# Altium PCB CAN-to-CAN.PcbDoc
Units mm, origin at the board's own origin, x right, y up, seen from the top; angles counter-clockwise.
Board outline 50.93 x 100.58 mm, 4 copper layers (Top Layer 1, GND, +5V, Bottom Layer 4), stack 0.603 mm thick; 112 components, 87 nets, 365 pads, 120 vias.
Unrouted connection lines stored in the file: 50.
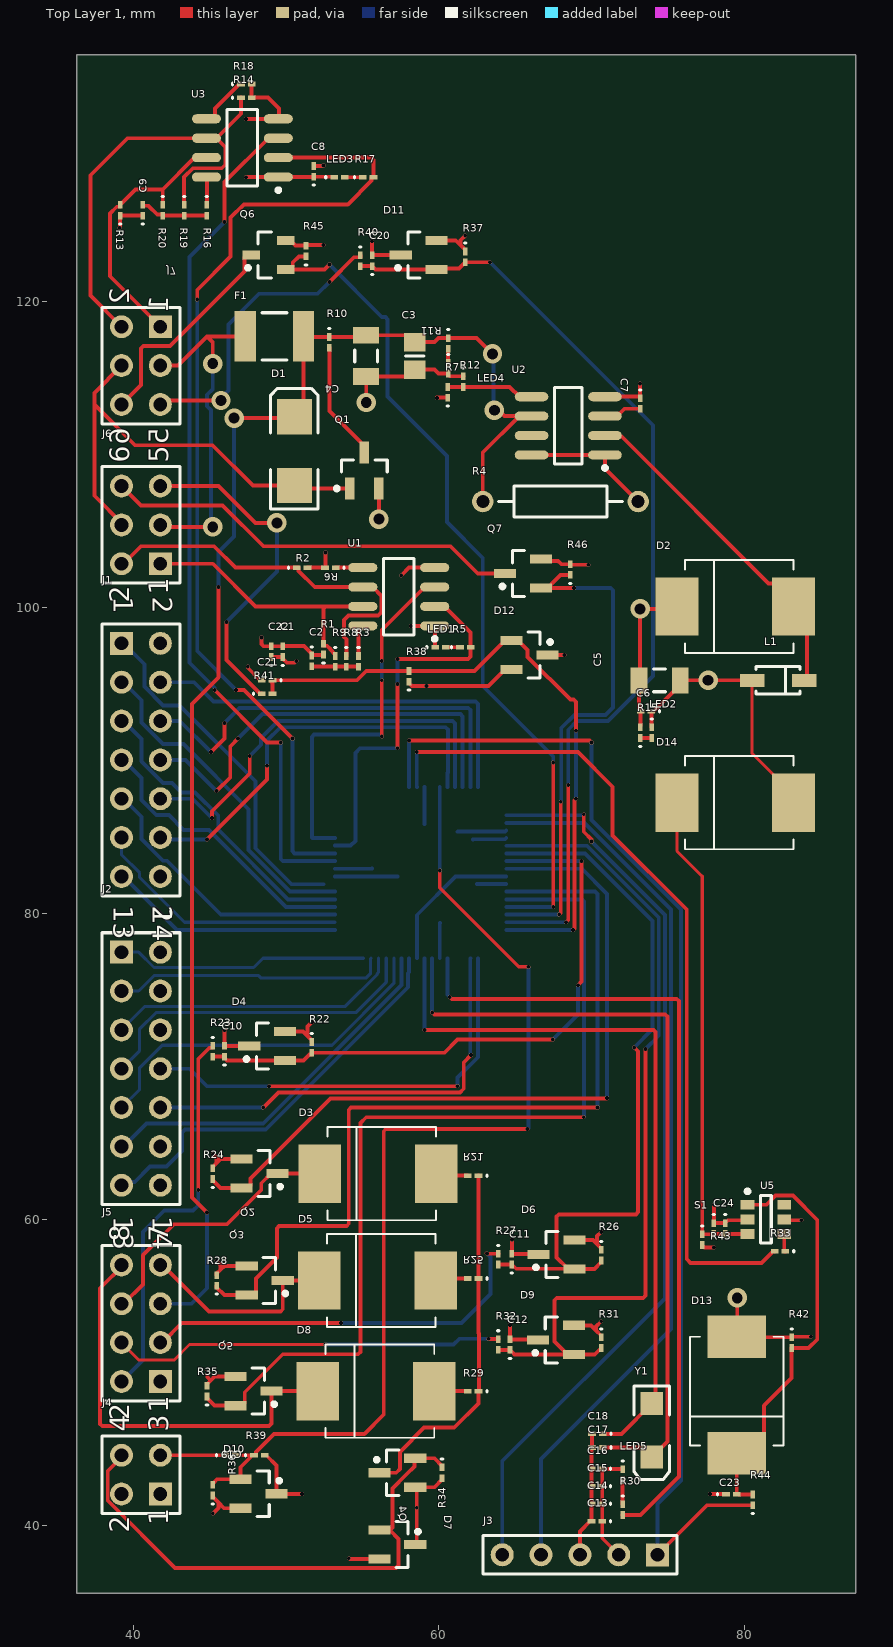
[diagram p0: Top Layer 1 view]
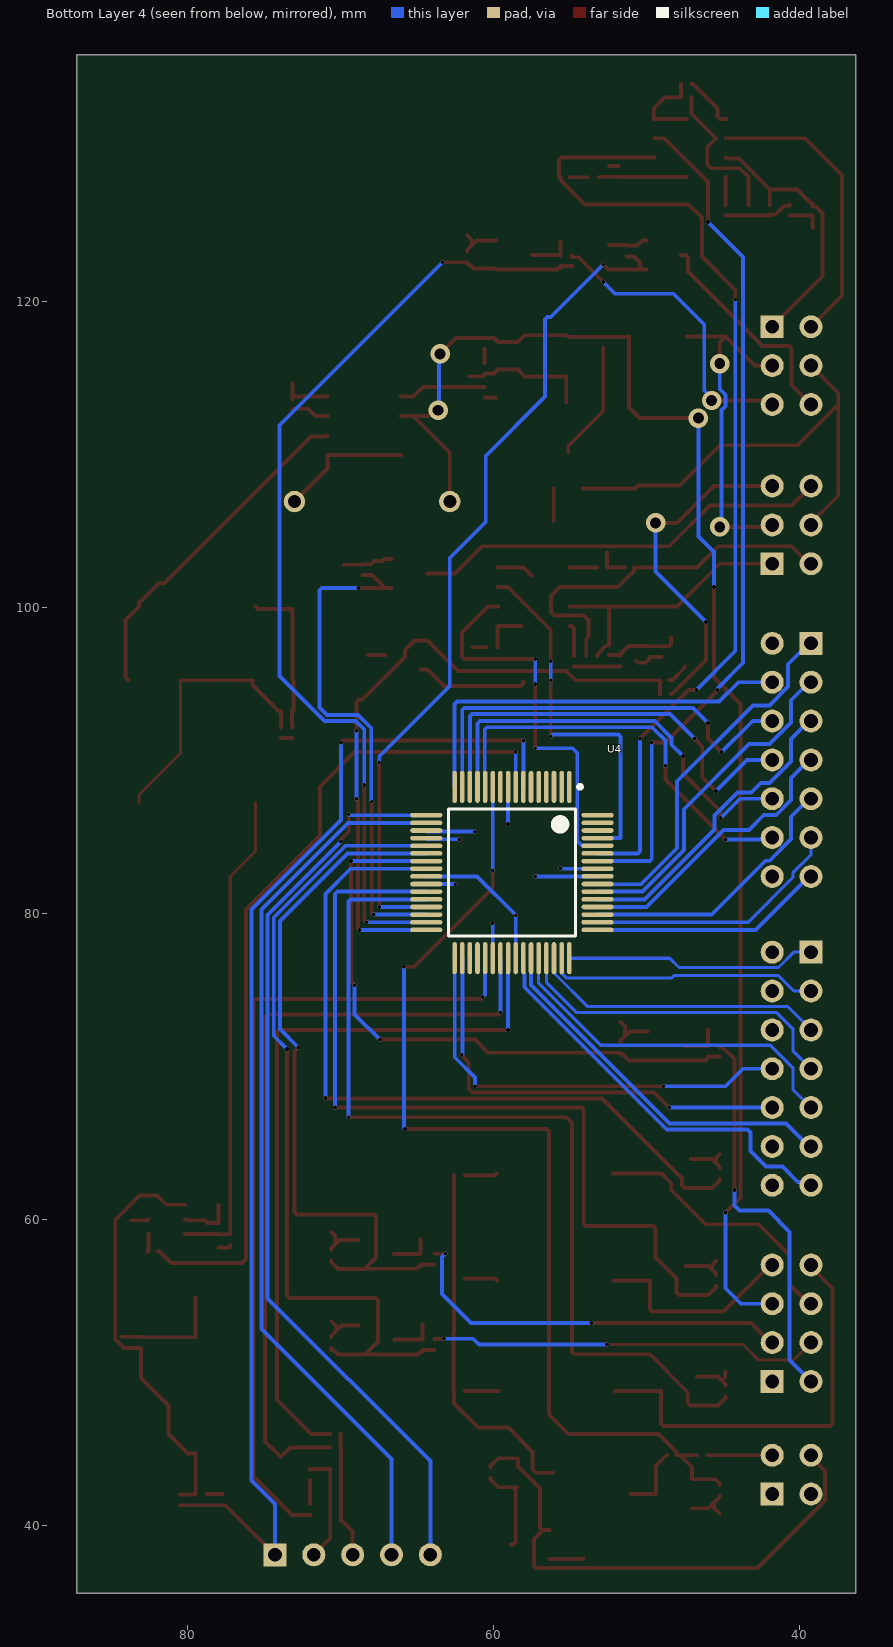
[diagram p1: Bottom Layer 4 view, seen from below]
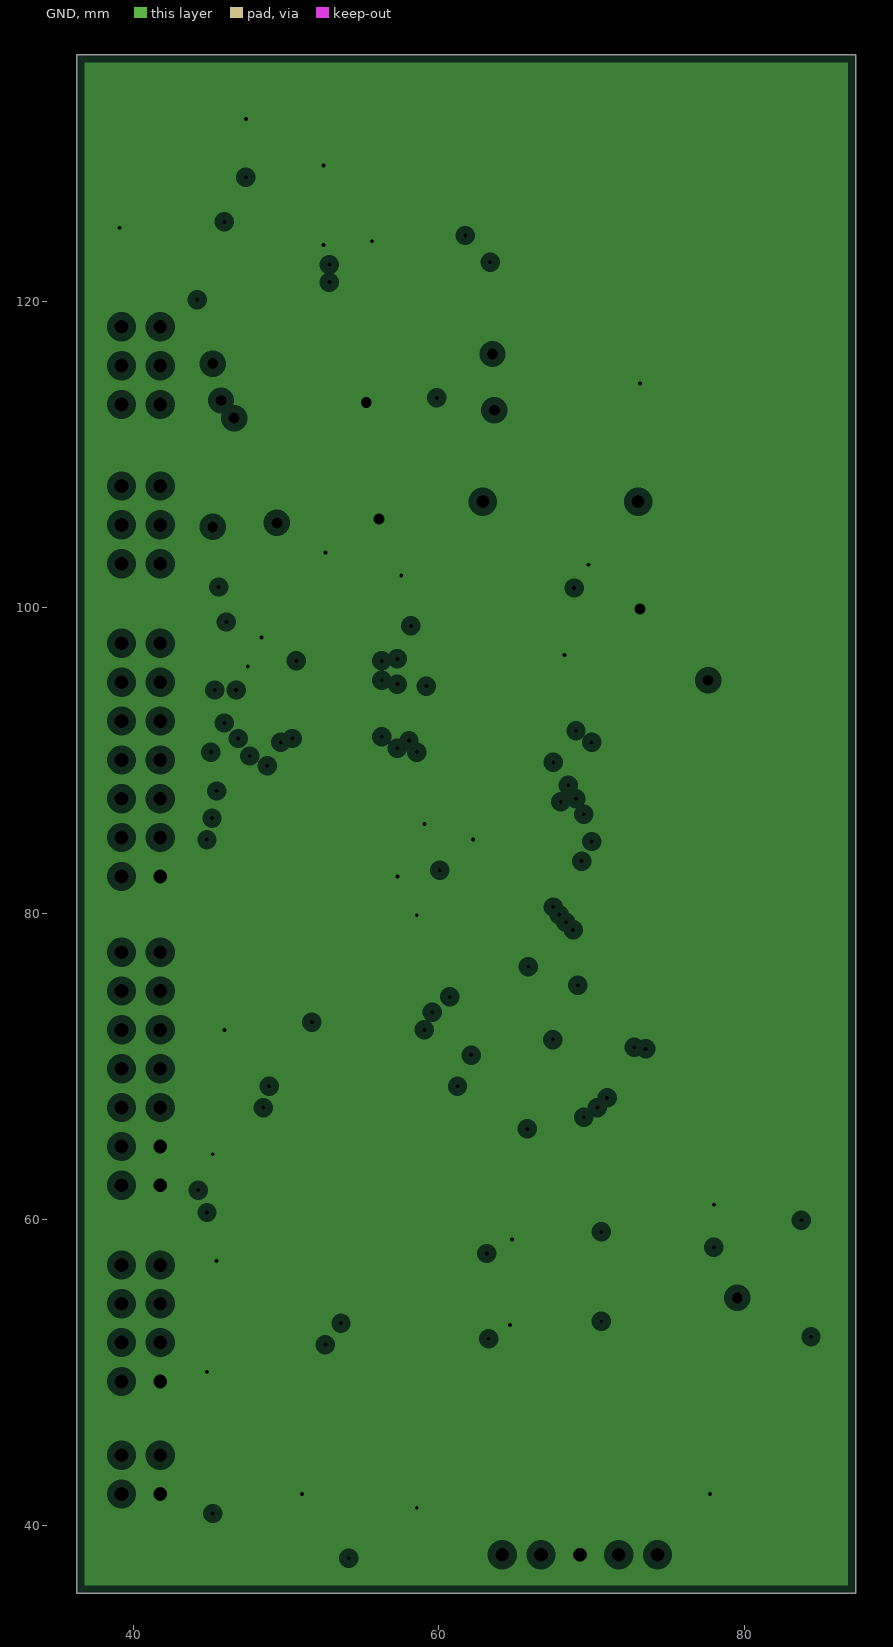
[diagram p2: GND, clearances drawn from the general rule]
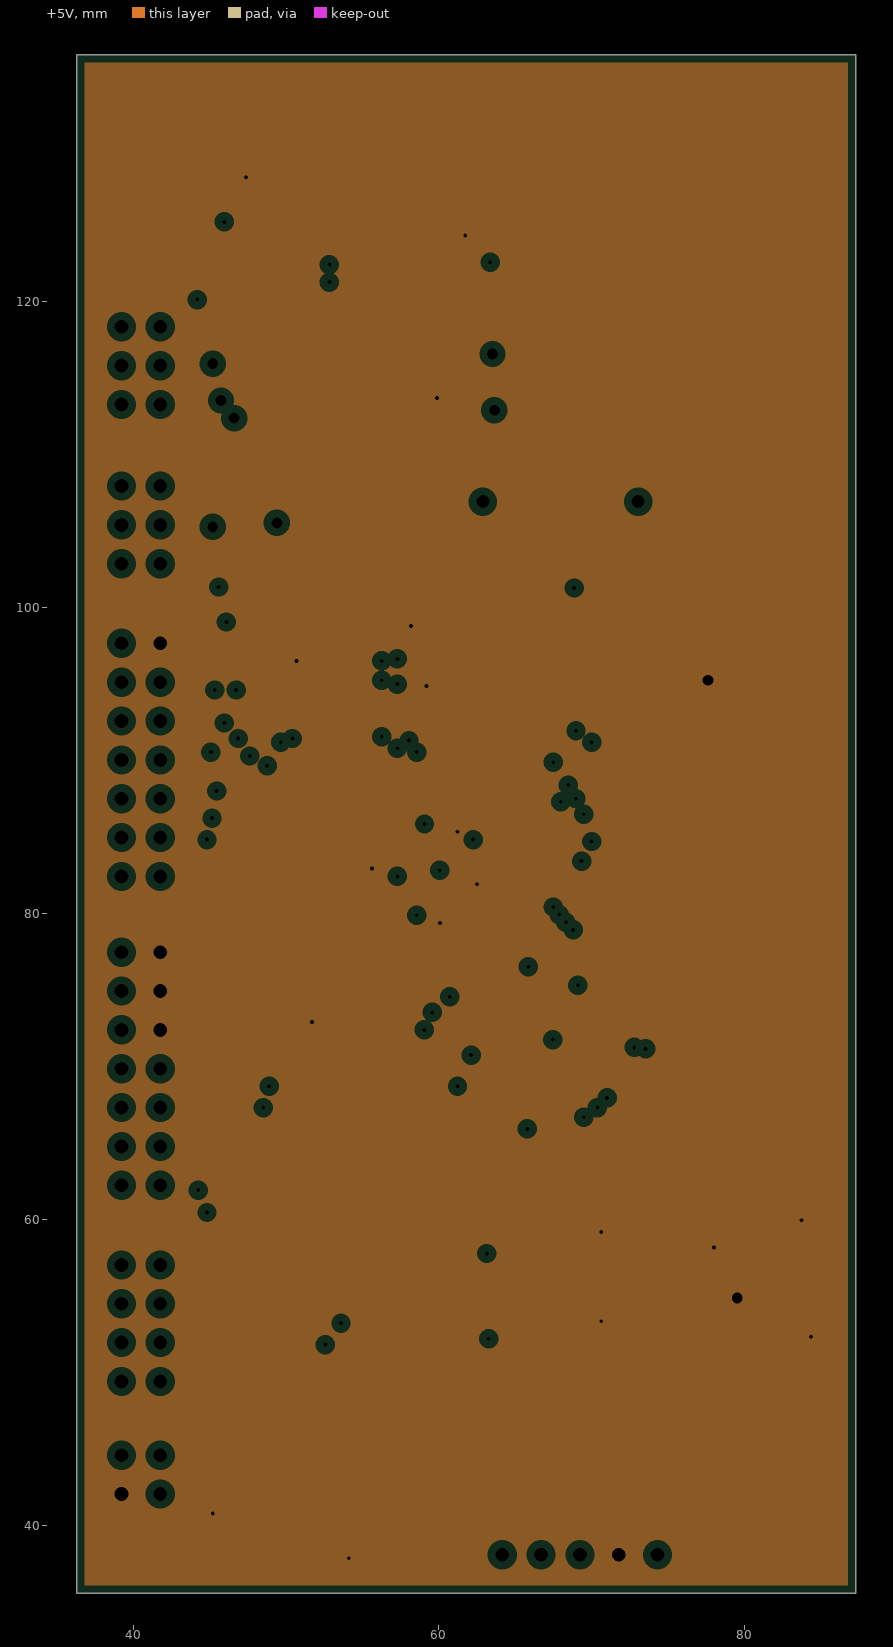
[diagram p3: +5V, clearances drawn from the general rule]

## Layer stack, top to bottom
Top Solder: solder mask 0.0102, Solder Resist, Dk 3.5
Top Layer 1: signal copper 0.0356
Dielectric 2: prepreg 0.0711, PP-006, Dk 4.1
GND: plane copper 0.035, net GND
Dielectric 1: dielectric 0.32, FR-4, Dk 4.8
+5V: plane copper 0.035, net +5V
Dielectric 3: prepreg 0.0711, PP-006, Dk 4.1
Bottom Layer 4: signal copper 0.0356
Bottom Solder: solder mask 0.0102, Solder Resist, Dk 3.5

## Board outline
36.322,136.144 87.249,136.144 87.249,35.56 36.322,35.56

## Design rules (kind name [scope] priority, off if disabled: settings)
Clearance [All] p1: gap=0.152 ignorepadtopadclearanceinfootprint=FALSE except(0: Arc-Hole Track-Hole SMDPad-Hole THPad-Hole Via-Hole Fill-Hole Poly-Hole Region-Hole Text-Hole)
PlaneClearance [All] p1: clearance=0.508
PlaneConnect [All] p1: planeconnectstyle=Relief reliefexpansion=0.508 reliefentries=4 reliefconductorwidth=0.254 reliefairgap=0.254
PolygonConnect [All] p1: connectstyle=Relief reliefconductorwidth=0.254 reliefentries=4 polygonreliefangle="90 Angle" airgapwidth=0.254
RoutingVias [All] p1: holewidth=0.711 width=1.27 viastyle="Through Hole" minholewidth=0.711 minwidth=1.27 maxholewidth=0.711 maxwidth=1.27
ShortCircuit [All] p1: allowed=TRUE
SolderMaskExpansion [All] p1: expansion=0.102 istentingtop=FALSE
Width [All] p1: maxlimit=0.254 minlimit=0.203 preferedwidth=0.254 minimp=50.000000 maximp=50.000000 favimp=50.000000
27 further rules are at their usual default settings.

## Components (designator, comment, footprint, x,y, rotation, side; value= is the part's Value field where it differs from the comment)
C1 "100n" 0603 49.784,97.124 r90 top
C2 "4n7" 0603 51.689,96.52 r270 top value=100n
C3 "100n" 6-0805_N 58.42,116.459 r270 top
C4 "Cap Semi" C1206 55.245,116.459 r270 top value=100pF
C5 "Cap Semi" C1206 74.422,95.25 r180 top value=100pF
C6 "100n" 0603 73.533,93.218 r180 top
C7 "100p" 0603 73.154,113.344 r270 top value=100pF
C8 "100n" 0603 51.816,128.524 r90 top
C9 "4n7" 0603 40.64,125.984 r90 top value=100n
C10 "100n" 0603 45.974,70.993 r90 top
C11 "100n" 0603 64.77,57.404 r90 top
C12 "100n" 0603 64.643,51.816 r90 top
C13 "100n" 0603 70.327,40.259 r180 top
C14 "100n" 0603 70.327,41.402 r180 top
C15 "100n" 0603 70.327,42.545 r180 top
C16 "100n" 0603 70.327,43.688 r180 top
C17 "27p" 0603 70.358,45.085 r180 top value=100n
C18 "27p" 0603 70.358,45.974 r180 top value=100n
C19 "100n" 0603 48.26,44.577 r0 top
C20 "100n" 0603 55.626,122.682 r90 top
C21 "100n" 0603 48.768,95.25 r180 top
C22 "100n" 0603 49.022,97.124 r90 top
C23 "100n" 0603 79.121,42.037 r0 top
C24 "10n" 0603 78.709,59.405 r270 top value=100pF
D1 "P6SMB15A" SMB 50.546,110.236 r90 top
D2 "LL5817" DIODE_SMC 79.375,100.076 r0 top
D3 "LL4148" DIODE_SMC 56.007,62.992 r0 top
D4 "BAT54S" SOT23_M#1 48.767,71.335 r180 top
D5 "LL4148" DIODE_SMC 55.976,56.007 r0 top
D6 "BAT54S" SOT23_M#1 67.69,57.71 r180 top
D7 "BAT54S" SOT23_M#1 57.277,38.735 r0 top
D8 "LL4148" DIODE_SMC 55.88,48.768 r0 top
D9 "BAT54S" SOT23_M#1 67.648,52.122 r180 top
D10 "BAT54S" SOT23_M#1 48.204,42.061 r0 top
D11 "BAT54S" SOT23_M#1 58.673,123.063 r180 top
D12 "BAT54S" SOT23_M#1 65.913,96.901 r0 top
D13 "LL4148" DIODE_SMC 79.471,48.514 r90 top
D14 "LL4448" DIODE_SMC 79.375,87.249 r0 top
F1 "Fuse 1" 1812 49.245,117.729 r0 top
J1 "Header 7X2" HDR2X7 39.243,97.663 r270 top
J2 "Header 7X2" HDR2X7 39.243,77.47 r270 top
J3 "ZL201" HDR1X5 74.295,38.069 r180 top
J4 "MX-43045-0400" HDR2X2 41.783,42.037 r90 top
J5 "MX-43045-0800" HDR2X4 41.783,49.403 r90 top
J6 "MX-43045-0600" HDR2X3#1 41.783,102.87 r90 top
J7 "MX-43045-0600" HDR2X3#2 41.783,118.364 r270 top
L1 "Inductor Isolated" 425 82.169,95.25 r180 top value=10mH
LED1 "HCL-1904AYL" 0603 60.102,97.409 r0 top
LED2 "HCL-1903BG4" 0603 73.914,91.821 r270 top
LED3 "HCL-1906BR1" 0603 53.498,128.143 r0 top
LED4 "HCL-1904AYL" 0603 60.6,115.655 r270 top
LED5 "HCL-1906BR1" 0603 72.009,43.307 r270 top
Q1 "BSS138" SOT-23_M 55.118,108.966 r90 top
Q2 "BSS123" SOT23_M#2 48.26,62.992 r0 top
Q3 "BSS123" SOT23_M#2 48.61,56.007 r0 top
Q4 "BSS123" SOT23_M#2 57.277,43.434 r180 top
Q5 "BSS123" SOT23_M#2 47.879,48.768 r0 top
Q6 "BSS123" SOT23_N 48.864,123.063 r180 top
Q7 "BSS123" SOT23_M#1 65.501,102.235 r180 top
R1 "CAN0001" 0603 52.451,97.282 r90 top
R2 "CAN0001" 0603 51.054,102.616 r0 top
R3 "nc" 0603 54.737,96.489 r270 top value=1K
R4 "1R" AXIAL-0.4 67.945,106.934 r180 top value=1K
R5 "4k7" 0603 61.722,97.409 r0 top value=1K
R6 "1k" 0603 52.897,102.616 r180 top value=1K
R7 "3k6 1%" 0603 60.579,114.077 r90 top value=1K
R8 "68" 0603 53.944,96.489 r270 top value=1K
R9 "68" 0603 53.213,96.489 r270 top value=1K
R10 "1M" 0603 52.832,117.348 r270 top value=1K
R11 "1k2 1%" 0603 61.595,114.777 r270 top value=1K
R12 "4k7" 0603 60.6,117.275 r270 top value=1K
R13 "CAN0001" 0603 39.147,125.984 r90 top
R14 "CAN0001" 0603 47.402,133.35 r0 top
R15 "1k8" 0603 73.152,91.821 r90 top value=1K
R16 "nc" 0603 44.825,125.984 r270 top value=1K
R17 "4k7" 0603 55.372,128.143 r0 top value=1K
R18 "1k" 0603 47.402,134.239 r0 top value=1K
R19 "68" 0603 43.338,125.984 r270 top value=1K
R20 "68" 0603 41.941,125.984 r270 top value=1K
R21 "10k" 0603 62.23,62.865 r180 top value=1K
R22 "10k" 0603 51.689,71.247 r270 top value=1K
R23 "1k" 0603 45.212,70.993 r270 top value=1K
R24 "4k7" 0603 45.212,62.992 r90 top value=1K
R25 "10k" 0603 62.23,56.134 r180 top value=1K
R26 "10k" 0603 70.612,57.658 r270 top value=1K
R27 "1k" 0603 63.881,57.404 r270 top value=1K
R28 "4k7" 0603 45.466,56.007 r90 top value=1K
R29 "10k" 0603 62.23,48.768 r180 top value=1K
R30 "1k8" 0603 72.009,41.021 r270 top value=1K
R31 "10k" 0603 70.612,51.943 r270 top value=1K
R32 "1k" 0603 63.881,51.816 r270 top value=1K
R33 "nc" 0603 82.296,57.912 r180 top value=1K
R34 "4k7" 0603 60.198,43.434 r270 top value=1K
R35 "4k7" 0603 44.831,48.768 r90 top value=1K
R36 "10k" 0603 45.212,42.291 r90 top value=1K
R37 "10k" 0603 61.722,122.936 r270 top value=1K
R38 "10k" 0603 58.039,95.504 r90 top value=1K
R39 "470" 0603 46.355,44.577 r0 top value=1K
R40 "1k" 0603 54.864,122.682 r270 top value=1K
R41 "1k" 0603 48.768,94.361 r0 top value=1K
R42 "4k7" 0603 83.058,51.943 r270 top value=1K
R43 "10k" 0603 77.216,58.674 r270 top value=1K
R44 "4k7" 0603 80.518,41.656 r90 top value=1K
R45 "4k7" 0603 51.308,123.317 r90 top value=1K
R46 "4k7" 0603 68.58,102.489 r90 top value=1K
S1 "DTSM32NB" 0603 77.978,59.405 r270 top
U1 "MCP2551-I/SN" SO8_L 57.373,100.711 r180 top
U2 "MC33063AD" SO8_N 68.453,111.887 r180 top
U3 "MCP2551-I/SN" SO8_L 47.148,130.057 r180 top
U4 "PIC30F5011" ST-64-2_M 58.801,82.677 r270 bottom
U5 "MCP1320-46LT" SOT23-6_L 81.376,60.005 r0 top
Y1 "10MHz" 3.2X1.6X1.1 73.914,46.2 r270 top

## Footprints (in the part's own frame and the unit in brackets; to place one, negate y for a bottom-side part, rotate by r counter-clockwise, add the part's x,y. Pads: shape width x height; smd on the part's side, far side on the other; paste and mask are expansions set on the pad)
3.2X1.6X1.1 [mm] "SMT LED; 2 Flat Leads"
  rect 1.5x1.5 smd: 1(-1.75,0) 2(1.75,0)
  silkscreen extent -2.9,-1.15 3.2,1.15
6-0805_N [mm] "Chip Resistor, Body 2.0x1.2mm, IPC Medium Density"
  rect 1.2x1.4 smd: 1(-0.9,0) 2(0.9,0)
  silkscreen extent 0,-0.6 0,0.6, body extent -1.07,-0.7 1.07,0.7, height 0.7
425 [mm] "SOD-123; 2 Leads; Body 2.7 x 1.6 mm, (LxW)"
  rect 1.6x0.85 smd: 1(-1.7,0) 2(1.7,0)
  silkscreen extent -1.45,-0.9 1.45,0.9
0603 [mm] "Chip Inductor, Body 0.6x0.3mm, IPC High Density"
  rect 0.5x0.3 smd: 1(-0.35,0) 2(0.35,0)
  silkscreen extent -0.9,-0.05 -0.9,0.05, body extent -0.33,-0.18 0.33,0.18, height 0.55
1812 [mm] "Chip Capacitor, Body 4.5x3.2mm, IPC High Density"
  rect 1.4x3.3 smd: 1(-1.9,0) 2(1.9,0)
  silkscreen extent -0.8,-1.55 0.8,1.55, body extent -2.4,-1.7 2.4,1.7, height 1.4
AXIAL-0.4 [mm] "Axial Device, Thru-Hole; 2 Leads; 0.4 in Pin Spacing"
  round 1.4 hole 0.85: 1(-5.08,0) 2(5.08,0)
  silkscreen extent -4.06,-1.02 4.06,1.02
C1206 [mm] "Chip Capacitor, Body 3.2x1.6mm, IPC High Density"
  rect 1.1x1.7 smd: 1(-1.35,0) 2(1.35,0)
  silkscreen extent -0.4,-0.75 0.4,0.75, body extent -1.7,-0.9 1.7,0.9, height 1.3
DIODE_SMC [mil] "Diode; 2 Leads"
  rect 110x150 smd: 1(-150,0) 2(150,0)
  silkscreen extent -130,-120 150,120
HDR1X5 [mm] "Connector; Header; 5 Position"
  rect 1.5x1.5 hole 0.9: 1(0,0)
  round 1.5 hole 0.9: 2(2.54,0) 3(5.08,0) 4(7.62,0) 5(10.16,0)
  silkscreen extent -1.27,-1.27 11.43,1.27
HDR2X2 [mm] "Connector; Header; 2x2 Position"
  rect 1.5x1.5 hole 0.9: 1(0,0)
  round 1.5 hole 0.9: 2(0,2.54) 3(2.54,0) 4(2.54,2.54)
  silkscreen extent -1.27,-1.27 3.81,3.81
HDR2X3#1 [mm] "Connector; Header; 3x2 Position"
  rect 1.5x1.5 hole 0.9: 1(0,0)
  round 1.5 hole 0.9: 2(0,2.54) 3(2.54,0) 4(2.54,2.54) 5(5.08,0) 6(5.08,2.54)
  silkscreen extent -1.27,-1.27 6.35,3.81
HDR2X3#2 [mm] "Connector; Header; 3x2 Position"
  rect 1.5x1.5 hole 0.9: 1(0,0)
  round 1.5 hole 0.9: 2(0,-2.54) 3(2.54,0) 4(2.54,-2.54) 5(5.08,0) 6(5.08,-2.54)
  silkscreen extent -1.27,-3.81 6.35,1.27
HDR2X4 [mm] "Connector; Header; 4x2 Position"
  rect 1.5x1.5 hole 0.9: 1(0,0)
  round 1.5 hole 0.9: 2(0,2.54) 3(2.54,0) 4(2.54,2.54) 5(5.08,0) 6(5.08,2.54) 7(7.62,0) 8(7.62,2.54)
  silkscreen extent -1.27,-1.27 8.89,3.81
HDR2X7 [mm] "Connector; Header; 7x2 Position"
  rect 1.5x1.5 hole 0.9: 1(0,0)
  round 1.5 hole 0.9: 2(0,2.54) 3(2.54,0) 4(2.54,2.54) 5(5.08,0) 6(5.08,2.54) 7(7.62,0) 8(7.62,2.54) 9(10.16,0) 10(10.16,2.54) 11(12.7,0) 12(12.7,2.54) 13(15.24,0) 14(15.24,2.54)
  silkscreen extent -1.27,-1.27 16.51,3.81
SMB [mm] "DO-214-AA/SMB; 2 C-Bend Leads; Body 5.3 x 3.6 mm, inc. leads (LxW)"
  rect 2.3x2.3 smd: 1(-2.25,0) 2(2.25,0)
  silkscreen extent -3.8,-1.55 4.1,1.55
SO8_L [mm] "SOIC, 8-Leads, Body 4.9x3.9mm, Pitch 1.27mm, IPC High Density"
  oval 1.9x0.6 smd: 1(-2.35,1.905) 2(-2.35,0.635) 3(-2.35,-0.635) 4(-2.35,-1.905) 5(2.35,-1.905) 6(2.35,-0.635) 7(2.35,0.635) 8(2.35,1.905)
  silkscreen extent -2.48,-2.5 1,2.88, body extent -2,-2.5 2,2.5, height 1.75
SO8_N [mm] "SOIC, 8-Leads, Body 4.9x3.9mm, Pitch 1.27mm, IPC Medium Density"
  oval 2.2x0.6 smd: 1(-2.4,1.905) 2(-2.4,0.635) 3(-2.4,-0.635) 4(-2.4,-1.905) 5(2.4,-1.905) 6(2.4,-0.635) 7(2.4,0.635) 8(2.4,1.905)
  silkscreen extent -2.53,-2.5 0.9,2.88, body extent -2,-2.5 2,2.5, height 1.75
SOT23-6_L [mm] "SOT23, 6-Leads, Body 2.9x1.6mm, Pitch 0.95mm, Lead Span 2.7mm, IPC High Density"
  rect 0.9x0.65 smd: 1(-1.2,0.95) 2(-1.2,0) 3(-1.2,-0.95) 4(1.2,-0.95) 5(1.2,0) 6(1.2,0.95)
  silkscreen extent -1.32,-1.55 0.35,1.95, body extent -0.9,-1.55 0.9,1.55, height 1.45
SOT23_M#1 [mm] "SOT23, 3-Leads, Body 2.9x1.3mm, Pitch 0.95mm, Lead Span 2.3mm - Reverse Pinning, IPC Low Density"
  rect 1.45x0.6 smd: 1(1.175,0) 2(-1.175,-0.95) 3(-1.175,0.95)
  silkscreen extent -0.1,-1.5 1.47,1.5, body extent -0.7,-1.5 0.7,1.5, height 1.1
SOT23_M#2 [mm] "SOT23, 3-Leads, Body 2.9x1.3mm, Pitch 0.95mm, Lead Span 2.3mm - Reverse Pinning, IPC Low Density"
  rect 1.45x0.6 smd: 1(1.175,0) 2(-1.175,0.95) 3(-1.175,-0.95)
  silkscreen extent -0.1,-1.5 1.48,1.5, body extent -0.7,-1.5 0.7,1.5, height 1.1
SOT23_N [mm] "SOT23, 3-Leads, Body 2.9x1.3mm, Pitch 0.95mm, Lead Span 2.3mm - Reverse Pinning, IPC Medium Density"
  rect 1.15x0.6 smd: 1(1.125,0) 2(-1.125,-0.95) 3(-1.125,0.95)
  silkscreen extent -0.2,-1.5 1.47,1.5, body extent -0.7,-1.5 0.7,1.5, height 1.1
SOT-23_M [mm] "SOT23, 3-Leads, Body 2.9x1.3mm, Pitch 0.95mm, Lead Span 2.5mm, IPC Low Density"
  rect 1.45x0.6 smd: 1(-1.175,0.95) 2(-1.175,-0.95) 3(1.175,0)
  silkscreen extent -1.3,-1.5 0.7,1.92, body extent -0.7,-1.5 0.7,1.5, height 1.1
ST-64-2_M [mm] "Thin QFP, 64-Leads, Body 10x10mm, Pitch 0.5mm, IPC Low Density"
  oval 2.1x0.3 smd: 1(-5.6,3.75) 2(-5.6,3.25) 3(-5.6,2.75) 4(-5.6,2.25) 5(-5.6,1.75) 6(-5.6,1.25) 7(-5.6,0.75) 8(-5.6,0.25) 9(-5.6,-0.25) 10(-5.6,-0.75) 11(-5.6,-1.25) 12(-5.6,-1.75) 13(-5.6,-2.25) 14(-5.6,-2.75) 15(-5.6,-3.25) 16(-5.6,-3.75) 33(5.6,-3.75) 34(5.6,-3.25) 35(5.6,-2.75) 36(5.6,-2.25) 37(5.6,-1.75) 38(5.6,-1.25) 39(5.6,-0.75) 40(5.6,-0.25) 41(5.6,0.25) 42(5.6,0.75) 43(5.6,1.25) 44(5.6,1.75) 45(5.6,2.25) 46(5.6,2.75) 47(5.6,3.25) 48(5.6,3.75)
  oval 0.3x2.1 smd: 17(-3.75,-5.6) 18(-3.25,-5.6) 19(-2.75,-5.6) 20(-2.25,-5.6) 21(-1.75,-5.6) 22(-1.25,-5.6) 23(-0.75,-5.6) 24(-0.25,-5.6) 25(0.25,-5.6) 26(0.75,-5.6) 27(1.25,-5.6) 28(1.75,-5.6) 29(2.25,-5.6) 30(2.75,-5.6) 31(3.25,-5.6) 32(3.75,-5.6) 49(3.75,5.6) 50(3.25,5.6) 51(2.75,5.6) 52(2.25,5.6) 53(1.75,5.6) 54(1.25,5.6) 55(0.75,5.6) 56(0.25,5.6) 57(-0.25,5.6) 58(-0.75,5.6) 59(-1.25,5.6) 60(-1.75,5.6) 61(-2.25,5.6) 62(-2.75,5.6) 63(-3.25,5.6) 64(-3.75,5.6)
  silkscreen extent -5.72,-4.15 4.15,4.57, body extent -5,-5 5,5, height 1.6

## Part data
C1 C2 C3 C6 C7 C8 C9 C10 C11 C12 C13 C14 C15 C16 C17 C18 C19 C20 C21 C22 C23 C24: library part Cap, "Capacitor", LatestRevisionDate=17-Jul-2002, LatestRevisionNote="Re-released for DXP Platform.", PackageReference=RAD-0.3, Published=8-Jun-2000, Publisher="Altium Limited"
C4 C5: "Capacitor (Semiconductor SIM Model)", LatestRevisionDate=29-May-2009, LatestRevisionNote="IPC-7351 Footprint Added.", PackageDescription="Chip Capacitor", PackageReference=C1206, Published=8-Jun-2000, Publisher="Altium Limited"
D1: library part "D Zener", "Zener Diode", LatestRevisionDate=17-Jul-2002, LatestRevisionNote="Re-released for DXP Platform.", PackageReference=DIODE-0.7, Published=8-Jun-2000, Publisher="Altium Limited"
D2 D3 D5 D8 D13: library part 1N4148, "High Conductance Fast Diode", Code_JEDEC=DO-204-AH, ComponentLink1Description="Manufacturer Link", ComponentLink1URL=http://www.fairchildsemi.com/, ComponentLink2Description=Datasheet, ComponentLink2URL=http://www.fairchildsemi.com/ds/1N%2F1N4148.pdf, DatasheetDocument=1997, LatestRevisionDate=17-Jul-2002, LatestRevisionNote="Re-released for DXP Platform.", PackageReference=DO-35, Published=8-Jun-2000, Publisher="Altium Limited"
D4 D6 D7 D9 D10 D11 D12: "Schottky Barrier Double Diode", ComponentLink1Description="Manufacturer Link", ComponentLink1URL=http://www.semiconductors.philips.com/, ComponentLink2Description=Datasheet, ComponentLink2URL=http://www.semiconductors.philips.com/acrobat/datasheets/BAT54_SERIES_4.pdf, DatasheetVersion=4-Mar-2002, LatestRevisionDate=12-Dec-2006, LatestRevisionNote="IPC-7351 Footprint Added.", PackageDescription="3-Pin SOT-23 Package 0.95 mm Pitch, 2.3 mm Lead Span", PackageReference=SOT23, PackageVersion=May-1999, Published=17-Sep-2003, Publisher="Altium Limited"
D14: library part Diode, "Default Diode", PackageDocument=Sep-1996, Code_JEDEC=DO-214-AB, LatestRevisionDate=17-Jul-2002, LatestRevisionNote="Re-released for DXP Platform.", PackageReference=SMC, Published=8-Jun-2000, Publisher="Altium Limited"
F1: "Fuse", LatestRevisionDate=17-Jul-2002, LatestRevisionNote="Re-released for DXP Platform.", PackageReference=PIN-W2/E2.8, Published=8-Jun-2000, Publisher="Altium Limited"
J1 J2: "Header, 7-Pin, Dual row", LatestRevisionDate=17-Jul-2002, LatestRevisionNote="Re-released for DXP Platform.", Publisher="Altium Limited"
J3: library part CON5, "Connector"
J4: library part "Header 2X2", "Header, 2-Pin, Dual row", LatestRevisionDate=17-Jul-2002, LatestRevisionNote="Re-released for DXP Platform.", Publisher="Altium Limited"
J5: library part "Header 4X2A", "Header, 4-Pin, Dual row", LatestRevisionDate=17-Jul-2002, LatestRevisionNote="Re-released for DXP Platform.", Publisher="Altium Limited"
J6 J7: library part "Header 6", "Header, 6-Pin", LatestRevisionDate=17-Jul-2002, LatestRevisionNote="Re-released for DXP Platform.", Publisher="Altium Limited"
L1: "Isolated Inductor", LatestRevisionDate=17-Jul-2002, LatestRevisionNote="Re-released for DXP Platform.", PackageDescription="SOD-123; 2 Leads; Body 2.7 x 1.6 mm, (LxW)", PackageReference=425, PackageVersion=1988, Published=24-Mar-1999, Publisher="Altium Limited"
LED1 LED2 LED3 LED4 LED5: library part LED3, "Typical BLUE SiC LED", Published=8-Jun-2000, Publisher="Altium Limited", Revision 1="Jul-2002: Re-released for DXP Platform.", Revision 2="17-Dec-2003: PCB Footprint replaced."
Q1: "N-Channel Enhancement Mode Vertical DMOS FET", ComponentLink1Description="Manufacturer Link", ComponentLink1URL=http://www.zetex.com/, ComponentLink2Description=Datasheet, ComponentLink2URL=www.zetex.com/3.0/pdf/BSS138.pdf, DatasheetVersion=Mar-96, PackageDescription="SOT-23; 3 Leads; Body 3.1 x 2.5 mm, inc. leads (LxW max), Alternate Lead Configuration", PackageReference=SOT23, PackageVersion=1996, Published=17-Dec-2003, Publisher="Altium Limited"
Q2 Q3 Q4 Q5 Q6 Q7: "N-channel Enhancement Mode Vertical D-MOSFET", ComponentLink1Description="Manufacturer Link", ComponentLink1URL=http://www.semiconductors.philips.com/, ComponentLink2Description=Datasheet, ComponentLink2URL=http://www.semiconductors.philips.com/acrobat/datasheets/BSS123_3.pdf, DatasheetVersion=Apr-1995, LatestRevisionDate=12-Dec-2006, LatestRevisionNote="IPC-7351 Footprint Added.", PackageDescription="3-Pin SOT-23 Package 0.95 mm Pitch, 2.3 mm Lead Span", PackageReference=SOT23, PackageVersion=May-1999, Published=17-Sep-2003, Publisher="Altium Limited"
R1 R2 R13 R14: library part "Res Varistor", "Varistor (Voltage-Sensitive Resistor)", LatestRevisionDate=04-Mar-2005, LatestRevisionNote="PCB Footprint replaced.", PackageReference=6-0805, Published=24-Mar-1999, Publisher="Altium Limited"
R3 R4 R5 R6 R7 R8 R9 R10 R11 R12 R15 R16 R17 R18 R19 R20 R21 R22 R23 R24 R25 R26 R27 R28 R29 R30 R31 R32 R33 R34 R35 R36 R37 R38 R39 R40 R41 R42 R43 R44 R45 R46: library part Res2, "Resistor", LatestRevisionDate=17-Jul-2002, LatestRevisionNote="Re-released for DXP Platform.", PackageReference=AXIAL-0.4, Published=8-Jun-2000, Publisher="Altium Limited"
S1: library part PUSHB, "Switch PushButton"
U1 U3: "High Speed CAN Transceiver, 8-Pin Plastic SOIC, Industrial Grade", Code_JEDEC=MS-012, ComponentLink1Description="Manufacturer Link", ComponentLink1URL=http://www.microchip.com, ComponentLink2Description=Datasheet, ComponentLink2URL=http://ww1.microchip.com/downloads/en/DeviceDoc/21667d.pdf, DatasheetVersion=Nov-2003, LatestRevisionDate=13-Apr-2006, LatestRevisionNote="IPC-7351 Footprint Added.", PackageDescription="8-Pin Plastic Narrow Body Small Outline Integrated Circuit 1.27 mm Pitch", PackageReference=SOIC150-8, PackageVersion=Oct-2005, Published=6-Oct-2005, Publisher="Altium Limited"
U2: "DC-to-DC Converter Control Circuit", Code_IPC=SOIC127P600-8, Code_JEDEC=MS-012-AA, ComponentLink1Description="Manufacturer Link", ComponentLink1URL=http://www.onsemi.com/site/products/taxonomy/0,4438,503,00.html, ComponentLink2Description=Datasheet, ComponentLink2URL=http://www.onsemi.com/pub/Collateral/MC34063A-D.PDF, DatasheetVersion=1988, LatestRevisionDate=13-Apr-2006, LatestRevisionNote="IPC-7351 Footprint Added.", PackageDescription="8-Pin Small Outline Integrated Circuit 1.27 mm Pitch", PackageReference=751-02, Published=17-Jul-2002, Publisher="Altium Limited"
U4: "PIC30F5011 - Up"
U5: library part MCP1320
Y1: library part XTAL, "Crystal Oscillator", LatestRevisionDate=17-Jul-2002, LatestRevisionNote="Re-released for DXP Platform.", PackageReference=R38, Published=8-Jun-2000, Publisher="Altium Limited"

## Via types
v1: diameter 0.254, hole 0.254, Top Layer 1 to Bottom Layer 4, 64 vias
v2: diameter 0.254, hole 0.254, Top Layer 1 to GND, 22 vias
v3: diameter 0.254, hole 0.254, Top Layer 1 to +5V, 14 vias
v4: diameter 1.27, hole 0.711, Top Layer 1 to Bottom Layer 4, 7 vias
v5: diameter 0.254, hole 0.254, +5V to Bottom Layer 4, 4 vias
v6: diameter 0.254, hole 0.254, GND to Bottom Layer 4, 4 vias
v7: diameter 1.27, hole 0.711, Top Layer 1 to GND, 3 vias
v8: diameter 1.27, hole 0.711, Top Layer 1 to +5V, 2 vias

## Nets (pads, with @x,y where several pads share a name; then routed paths per layer and width w, separated by ;. In a path a pad name is that pad's centre, name@x,y a point inside that pad or via, vN(x,y) a via of type N, cw(c..) or ccw(c..) an arc to the next point about the centre after c; other vN are vias at no path point)
+5V: C1.1 C5.1 C6.1 C8.1 C13.1 C14.1 C15.1 C16.1 C22.1 D4.2 D6.2 D7.2 D9.2 D10.2 D11.2 D12.2 D13.2 D14.2 J1.2 J2.2 J2.4 J2.6 J3.2 J4.2 L1.2 LED1.1 LED2.1 LED3.1 LED5.1 R7.1 R22.1 R26.1 R31.1 R36.1 R37.1 R38.1 R42.1 R43.2 U1.1 U3.1 U4.19 U4.26 U4.38 U4.57 U5.5 | length 80.7
  Top Layer 1 w0.203: L1.2 80.469,90.473 83.185,87.757 D14.2
  Top Layer 1 w0.254: v3(45.212,40.767) 45.577,41.132 45.577,41.476 ; R36.1 45.212,41.841 45.577,41.476 ; D10.2 45.942,41.111 45.577,41.476 ; v3(47.371,128.143) 47.38,128.152 U3.1 49.509,128.163 51.805,128.163 C8.1 53.017,128.174 53.048,128.143 LED3.1 ; C22.1 C1.1 49.807,96.751 49.807,96.651 50.061,96.397 50.55,96.397 v3(50.673,96.52) ; D4.2 51.101,72.285 51.395,71.991 ; R22.1 51.689,71.697 51.395,71.991 ; v3(51.689,72.898) 51.395,72.604 51.395,71.991 ; v3(54.102,37.846) 54.163,37.785 D7.2@56.356,37.785 ; R38.1 58.039,95.054 58.224,94.869 v3(59.182,94.869) 63.231,94.869 64.313,95.951 D12.2 ; v3(58.166,98.806) U1.1 59.752,98.777 LED1.1 ; D11.2 61.095,124.013 61.409,123.7 ; v3(59.863,113.711) 59.879,113.727 R7.1 ; R37.1 61.722,123.386 61.409,123.7 ; v3(61.722,124.333) 61.409,124.02 61.409,123.7 ; D9.2 69.933,53.072 70.273,52.732 ; D6.2 70.06,58.66 70.336,58.384 ; R31.1 70.612,52.393 70.273,52.732 ; v3(70.612,53.34) 70.273,53.001 70.273,52.732 ; R26.1 70.612,58.108 70.336,58.384 ; v3(70.612,59.182) 70.336,58.906 70.336,58.384 ; J3.2 70.677,39.147 C13.1 C14.1 C15.1 C16.1 71.986,43.688 72.009,43.665 LED5.1 ; C6.1 C6.1@73.899,93.233 ; LED2.1 73.899,92.187 C6.1@73.899,93.233 ; R43.2 77.216,58.224 77.239,58.201 77.339,58.201 77.374,58.166 v3(77.978,58.166) ; v8(79.502,54.864) 79.502,52.355 D13.2 79.502,52.293 R42.1 83.058,52.301 83.081,52.324 v3(84.328,52.324) ; L1.2 v8(77.597,95.25) C5.1 75.772,94.95 74.063,93.241 73.906,93.241 C6.1@73.899,93.233 ; U5.5 82.637,59.944 v3(83.693,59.944)
  Bottom Layer 4 w0.254: U4.57 55.622,82.927 v5(55.626,82.931) ; U4.38 60.051,79.355 v5(60.071,79.375) ; v5(61.214,85.344) 61.226,85.356 64.33,85.356 U4.19 ; v5(62.484,81.915) 62.496,81.927 U4.26
+12V: C3.1 C4.1 D1.2 F1.2 J5.5 R4.2 R10.1 R12.1 U2.6 | length 97.3
  Top Layer 1 w0.254: v1(44.831,60.452) 43.853,61.43 43.853,93.704 45.593,95.444 v1(45.593,101.346) ; v4(46.609,112.395) 50.455,112.395 D1.2 51.145,113.085 F1.2 51.176,117.698 R10.1 55.078,117.698 55.189,117.809 C4.1 57.97,117.809 C3.1 59.714,117.359 59.979,117.625 R12.1 62.461,117.625 v4(63.5,116.586) ; R4.2 62.865,110.134 U2.6@65.253,112.522 ; v4(63.627,112.903) 63.902,112.903 64.283,112.522 U2.6@65.253,112.522 ; U2.6 U2.6@65.253,112.522
  Bottom Layer 4 w0.254: J5.5@41.91,54.483 43.815,54.483 44.831,55.499 v1(44.831,60.452) ; v1(45.593,101.346) 45.593,103.632 46.609,104.648 v4(46.609,112.395) ; v4(63.5,116.586) 63.563,116.522 63.563,112.966 v4(63.627,112.903)
+12VPWR: F1.1 J6.3 J7.3 | length 22.6
  Top Layer 1 w0.254: J7.3 42.926,115.824 44.831,117.729 ; J6.3@41.91,105.41 42.037,105.283 v4(45.212,105.283) ; v4(45.212,115.951) 45.212,117.348 44.831,117.729 ; F1.1 44.831,117.729
  Bottom Layer 4 w0.254: v4(45.212,105.283) 45.085,105.41 45.085,112.91 44.831,113.164 44.831,113.922 45.212,114.303 v4(45.212,115.951)
ADC0: J1.4 U4.16 | length 26.7
  Bottom Layer 4 w0.254: J1.4@41.91,95.123 43.984,95.123 45.254,93.853 62.402,93.853 62.551,93.704 U4.16
ADC1: J1.6 U4.15 | length 27.9
  Top Layer 1 w0.254: v1(45.085,90.551) 45.974,91.44 v1(45.974,92.456)
  Bottom Layer 4 w0.254: J1.6@41.91,92.583 43.053,92.583 v1(45.085,90.551) ; v1(45.974,92.456) 46.965,93.447 61.902,93.447 62.051,93.298 U4.15
ADC2: J1.8 U4.14 | length 28.4
  Top Layer 1 w0.254: v1(45.466,88.011) 46.355,88.9 46.355,90.932 v1(46.863,91.44)
  Bottom Layer 4 w0.254: J1.8@41.91,90.043 43.434,90.043 v1(45.466,88.011) ; v1@46.858,91.435 v1(46.863,91.44) 48.463,93.04 61.402,93.04 61.551,92.891 U4.14
ADC3: J1.10 U4.13 | length 27.7
  Top Layer 1 w0.254: v1(45.159,86.233) 45.159,86.688 47.625,89.154 v1(47.625,90.297)
  Bottom Layer 4 w0.254: J1.10@41.91,87.503 43.875,87.503 v1@45.152,86.226 ; v1(47.625,90.297) 48.362,91.034 48.362,91.481 49.463,92.583 60.902,92.583 61.051,92.434 U4.13
ADC4: J1.12 U4.12 | length 27.1
  Top Layer 1 w0.254: v1(44.831,84.836) 48.768,88.773 v1(48.768,89.662)
  Bottom Layer 4 w0.254: J1.12@41.91,84.963 42.037,84.836 v1(44.831,84.836) ; v1(48.768,89.662) 48.768,91.313 49.632,92.177 60.43,92.177 60.579,92.028 60.579,89.217 60.551,89.189 U4.12
ButD: C10.1 D4.3 R22.2 R23.2 U4.23 | length 40.4
  Top Layer 1 w0.254: R23.2 C10.1 45.974,70.543 46.132,70.385 D4.3 51.151,70.385 51.54,70.774 51.666,70.774 51.689,70.797 R22.2 60.356,70.897 61.214,71.755 v1(67.437,71.755) ; v1(69.088,75.311) 69.33,75.553 v1(69.33,83.427)
  Bottom Layer 4 w0.254: U4.23 v1(69.33,83.427) ; v1(67.437,71.755) 69.088,73.406 v1(69.088,75.311)
ButD_IN: J5.2 R23.1 | length 25.6
  Top Layer 1 w0.254: v1(44.259,61.912) 44.259,70.486 44.994,71.22 45.189,71.22 45.212,71.243 R23.1
  Bottom Layer 4 w0.254: J5.2@39.37,49.403 39.37,49.53 40.64,50.8 40.64,59.182 42.037,60.579 43.92,60.579 44.259,60.918 v1(44.259,61.912)
ButN: C11.1 D6.3 R26.2 R27.2 U4.22 | length 47.4
  Top Layer 1 w0.254: R27.2 C11.1 64.77,56.954 64.793,56.931 64.893,56.931 65.055,56.769 D6.3@68.431,56.769 ; R26.2 70.612,57.208 70.164,56.76 D6.3 68.44,56.76 D6.3@68.431,56.769 ; v1(72.771,71.247) 73.025,70.993 73.025,60.474 72.876,60.325 67.84,60.325 67.691,60.176 67.691,57.509 D6.3@68.431,56.769
  Bottom Layer 4 w0.254: U4.22 69.54,83.927 73.965,79.502 73.965,72.441 v1(72.771,71.247)
ButN_IN: J5.3 R27.1 | length 26.3
  Top Layer 1 w0.254: J5.3@41.91,51.943 43.18,53.213 v1(53.594,53.213) ; v1@63.119,57.785 63.15,57.754 R27.1
  Bottom Layer 4 w0.254: v1(53.594,53.213) 61.468,53.213 63.373,55.118 63.373,57.531 v1(63.134,57.77)
ButR: C12.1 D9.3 R31.2 R32.2 U4.21 | length 54.1
  Top Layer 1 w0.254: R32.2 C12.1 64.643,51.366 64.666,51.343 64.766,51.343 64.937,51.172 D9.3@68.398,51.172 ; R31.2 70.612,51.493 70.589,51.47 70.483,51.47 70.185,51.172 D9.3 D9.3@68.398,51.172 ; v1@73.508,71.12 73.508,55.013 73.359,54.864 67.713,54.864 67.564,54.715 67.564,52.006 D9.3@68.398,51.172
  Bottom Layer 4 w0.254: U4.21 69.684,84.427 74.371,79.74 74.371,72.009 v1(73.508,71.145)
ButR_IN: J5.4 R32.1 | length 25.7
  Top Layer 1 w0.203: J5.4 40.386,50.8 42.672,50.8 43.688,51.816 v1(52.578,51.816)
  Top Layer 1 w0.254: v1(63.246,52.197) 63.277,52.166 R32.1
  Bottom Layer 4 w0.254: v1(52.578,51.816) 60.96,51.816 61.341,52.197 v1(63.246,52.197)
CAN_BMS_RX: U3.3 U4.58 | length 56.5
  Top Layer 1 w0.254: v1(45.339,94.615) 48.768,91.186 v1(49.657,91.186) ; v1(45.974,125.222) 45.974,127.818 48.848,130.692 U3.3
  Bottom Layer 4 w0.254: v1(45.339,94.615) 45.339,94.742 43.688,96.393 43.688,122.936 v1(45.974,125.222) ; v1(49.657,91.186) 49.657,83.576 49.806,83.427 U4.58
CAN_BMS_TX: R17.2 U3.2 U4.59 | length 66
  Top Layer 1 w0.254: v1(44.196,120.142) 44.196,120.777 46.38,122.961 46.38,125.501 47.244,126.365 54.039,126.365 55.599,127.925 55.599,128.12 55.622,128.143 R17.2 55.722,129.273 55.573,129.422 U3.2 ; v1(46.736,94.615) 47.244,94.615 v1(50.419,91.44)
  Bottom Layer 4 w0.254: v1(44.196,120.142) 44.196,97.155 v1(46.736,94.615) ; v1(50.419,91.44) 50.419,84.074 50.566,83.927 U4.59
CAN_BMSS_H: J7.1 R13.2 R20.1 U3.7 | length 17.7
  Top Layer 1 w0.254: J7.1 38.481,121.666 38.481,125.763 38.929,126.211 39.075,126.211 39.124,126.211 39.147,126.234 R13.2 39.147,126.434 39.17,126.457 39.27,126.457 40.152,127.339 41.941,127.339 ; R20.1 41.941,127.339 ; U3.7 44.732,129.355 43.958,129.355 41.941,127.339
CAN_BMSS_L: J7.2 R14.1 R19.1 U3.6 | length 29.5
  Top Layer 1 w0.254: J7.2 37.211,120.396 37.211,128.27 39.633,130.692 U3.6 ; R19.1 43.338,128.161 43.908,128.731 45.8,128.731 46.027,128.958 46.027,130.112 45.448,130.692 47.052,132.296 R14.1
CAN_MUX_RX: U1.3 U4.61 | length 24.4
  Top Layer 1 w0.254: v1(56.261,91.567) v1(56.261,95.25) ; v1(56.261,96.52) 56.261,98.534 59.073,101.346 U1.3
  Bottom Layer 4 w0.254: U4.61 51.725,84.927 51.689,84.963 51.689,91.545 51.838,91.694 56.134,91.694 v1(56.261,91.567) ; v1(56.261,95.25) v1(56.261,96.52)
CAN_MUX_TX: R5.2 U1.2 U4.60 | length 25.4
  Top Layer 1 w0.254: v1(57.277,90.805) v1(57.277,94.996) ; v1(57.277,96.647) 61.914,96.647 62.072,96.805 R5.2 62.072,98.377 60.373,100.076 U1.2
  Bottom Layer 4 w0.254: U4.60 53.21,84.436 54.217,84.436 54.53,84.749 54.53,90.504 54.832,90.805 v1(57.277,90.805) ; v1(57.277,94.996) v1(57.277,96.647)
CAN_MUXED_H: J6.1 R1.2 R9.1 U1.7 | length 18
  Top Layer 1 w0.254: J6.1@41.91,102.87 45.212,102.87 48.006,100.076 52.6,100.076 ; R9.1 53.213,96.939 52.896,97.256 52.896,97.282 52.669,97.509 52.474,97.509 52.451,97.532 R1.2 52.451,99.927 52.6,100.076 ; U1.7 52.6,100.076
CAN_MUXED_L: J6.2 R2.1 R8.1 U1.6 | length 25
  Top Layer 1 w0.254: J6.2@39.37,102.87 40.513,104.013 45.293,104.013 46.69,102.616 R2.1 50.804,102.616 50.827,102.593 50.827,102.398 51.879,101.346 U1.6 55.673,101.346 56.252,100.767 56.252,99.717 56.032,99.497 54.093,99.497 53.794,99.197 53.794,98.079 53.944,97.929 R8.1
ChrgLED: Q6.3 R45.1 U4.29 | length 55.8
  Top Layer 1 w0.254: Q6.3 Q6.3@50.264,122.113 ; R45.1 50.843,122.967 50.437,122.561 50.437,122.286 Q6.3@50.264,122.113 ; v1(52.832,122.428) 52.517,122.113 Q6.3@50.264,122.113 ; v1(67.473,80.427) v1(67.473,89.88)
  Bottom Layer 4 w0.254: v1(52.832,122.428) 56.261,118.999 56.493,118.999 56.642,118.85 56.642,113.792 60.515,109.918 60.515,105.6 62.865,103.251 62.865,94.869 67.473,90.261 v1(67.473,89.88) ; U4.29 v1(67.473,80.427)
ChrgLED_OUT: J7.6 Q6.1 | length 14.5
  Top Layer 1 w0.254: J7.6 40.513,114.554 40.513,116.945 40.662,117.094 42.408,117.094 47.291,121.977 47.291,122.89 47.464,123.063 Q6.1
FluidHeater: Q7.3 R46.1 U4.30 | length 33.9
  Top Layer 1 w0.254: Q7.3 Q7.3@67.101,101.285 ; v1(67.862,79.927) 67.963,80.028 v1(67.963,87.306) ; R46.1 67.955,102.139 Q7.3@67.101,101.285 ; v1(68.834,101.285) Q7.3@67.101,101.285
  Bottom Layer 4 w0.254: U4.30 v1(67.862,79.927) ; v1(67.963,87.306) 67.997,87.34 67.997,92.134 68.853,92.989 70.891,92.989 71.374,93.472 71.374,101.136 71.225,101.285 v1(68.834,101.285)
FluidHeater_OUT: J6.6 Q7.1 | length 27.4
  Top Layer 1 w0.254: J6.6@39.306,107.886 40.513,106.68 45.847,106.68 48.514,104.013 60.756,104.013 62.534,102.235 Q7.1
GND: C1.2 C2.1 C3.2 C4.2 C5.2 C6.2 C7.1 C8.2 C9.1 C10.2 C11.2 C12.2 C13.2 C14.2 C15.2 C16.2 C17.2 C18.2 C19.2 C20.2 C21.2 C22.2 C23.1 C24.1 D2.1 D4.1 D6.1 D7.1 D9.1 D10.1 D11.1 D12.1 J1.14 J2.12 J2.14 J3.3 J4.1 J5.1 LED4.2 Q1.2 Q2.2 Q3.2 Q4.2 Q5.2 Q6.2 Q7.2 R1.1 R2.2 R6.2 R11.1 R13.1 R14.2 R15.2 R18.2 R24.2 R28.2 R34.2 R35.2 R45.2 R46.2 S1.1 U1.4 U2.4 U3.4 U4.9 U4.20 U4.25 U4.41 U4.56 U5.2 | length 112.8
  Top Layer 1 w0.254: v2(39.116,124.841) 39.147,124.872 R13.1 C9.1 ; R35.2 44.831,49.218 45.081,49.468 ; v2(44.831,50.038) 44.871,49.998 44.871,49.678 45.081,49.468 ; R24.2 45.212,63.442 45.462,63.692 ; v2(45.212,64.262) 45.462,64.012 45.462,63.692 ; R28.2 45.466,56.457 45.716,56.707 ; v2(45.466,57.277) 45.716,57.027 45.716,56.707 ; v2(45.974,72.39) C10.2 45.978,71.339 47.588,71.339 D4.1 ; Q5.2 45.331,49.718 45.081,49.468 ; Q2.2 45.712,63.942 45.462,63.692 ; v2(47.371,131.953) 49.489,131.953 U3.4 49.53,131.994 49.53,132.643 48.823,133.35 R14.2 R18.2 ; Q3.2 45.966,56.957 45.716,56.707 ; v2(47.498,96.139) 47.498,96.07 48.295,95.273 48.495,95.273 48.518,95.25 C21.2@48.541,95.273 ; v2(48.387,98.044) 48.387,97.623 48.536,97.474 C22.2 ; C19.2 48.71,44.577 49.379,43.908 D10.1 49.403,42.037 v2(51.054,42.037) ; C22.2@49.022,97.49 49.037,97.474 49.769,97.474 C1.2@49.784,97.49 ; C1.2 C1.2@49.784,97.49 ; Q6.2 50.264,124.013 50.61,123.667 R45.2 51.308,123.675 51.331,123.698 v2(52.451,123.698) ; R2.2 R6.2 52.555,102.616 52.578,102.639 v2(52.578,103.607) ; C2.1 C2.1@51.689,96.878 ; C8.2 52.42,128.874 v2(52.451,128.905) ; R1.1 52.451,96.924 52.428,96.901 51.712,96.901 C2.1@51.689,96.878 ; v7(55.245,113.411) C4.2 57.964,115.109 58.413,115.559 C3.2 59.719,115.559 59.974,115.305 LED4.2 60.6,115.204 60.678,115.127 R11.1 ; v2(55.626,123.952) C20.2 55.641,123.048 57.482,123.048 D11.1 ; Q1.2 Q1.2 56.069,105.792 v7(56.07,105.791) v7@56.07,105.669 ; v2(57.531,102.108) 58.039,102.616 U1.4 ; Q4.2 58.501,42.484 Q4.2@58.877,42.484 ; D7.1@58.877,38.735 58.72,38.735 58.547,38.908 58.547,42.311 58.72,42.484 Q4.2@58.877,42.484 ; R34.2 60.198,42.984 59.698,42.484 Q4.2@58.877,42.484 ; v2(64.643,53.086) C12.2 64.665,52.144 66.451,52.144 D9.1 ; v2(64.77,58.674) C11.2 64.792,57.732 66.493,57.732 D6.1 ; Q7.2 67.148,103.185 67.274,103.059 67.782,103.059 68.002,102.839 R46.2 68.58,102.83 68.603,102.806 v2(69.787,102.806) ; D12.1 v2(68.199,96.901) ; J3.3 69.215,39.597 69.877,40.259 C13.2 C14.2 C15.2 C16.2 69.977,45.062 70,45.085 C17.2 C18.2 ; U2.4 73.131,113.792 C7.1@73.155,113.767 ; R15.2 73.152,92.271 73.175,92.294 73.175,93.195 73.183,93.203 C6.2 73.095,93.218 73.072,93.241 C5.2 73.152,95.33 73.152,99.731 73.339,99.918 75.407,99.918 D2.1 ; v7(73.152,99.918) v7@73.303,99.918 ; C7.1@73.155,113.595 C7.1@73.155,113.767 ; v2(73.155,114.664) C7.1@73.155,113.767 ; v2(77.724,42.037) C23.1 ; v2(77.978,60.96) S1.1 C24.1 78.709,59.855 78.732,59.878 78.832,59.878 78.898,59.944 80.115,59.944 U5.2 ; C1.2@49.784,97.49 51.17,97.49 51.689,96.97 C2.1@51.689,96.878
  Bottom Layer 4 w0.254: U4.56 53.205,82.423 v6(57.277,82.423) ; U4.41 58.551,79.879 v6(58.547,79.883) 61.091,82.427 U4.25 ; U4.9 59.051,85.856 v6(59.055,85.852) ; v6(62.23,84.836) 62.25,84.856 64.33,84.856 U4.20
  other v2: 58.547,41.148
GPIOC13: J2.3 U4.47 | length 17.9
  Bottom Layer 4 w0.203: J2.3 40.363,74.93 41.367,75.934 48.212,75.934 48.373,75.773 55.218,75.773 55.532,76.087 55.532,77.058 U4.47
GPIOC14: J2.1 U4.48 | length 16.5
  Bottom Layer 4 w0.203: J2.1 40.363,77.47 41.367,76.466 47.881,76.466 48.492,77.077 U4.48
GPIOD0: J2.5 U4.46 | length 19.3
  Bottom Layer 4 w0.203: J2.5 40.779,73.926 53.874,73.926 55.955,76.007 55.955,76.055 56.051,76.151 U4.46
GPIOD1: J1.13 U4.49 | length 15.3
  Bottom Layer 4 w0.254: J1.13@39.37,82.423 42.866,78.927 U4.49
GPIOD2: J1.11 U4.50 | length 17.1
  Bottom Layer 4 w0.203: J1.11 39.243,83.843 40.429,82.657 40.429,82.357 43.359,79.427 U4.50
GPIOD3: J1.9 U4.51 | length 17.8
  Bottom Layer 4 w0.254: J1.9@39.37,87.503 40.546,86.327 40.546,84.871 41.965,83.452 42.209,83.452 45.735,79.927 U4.51
GPIOD4: J1.7 U4.52 | length 18.7
  Bottom Layer 4 w0.254: J1.7@39.37,90.043 40.546,88.867 40.546,87.411 41.516,86.441 42.337,86.441 43.307,85.471 44.958,85.471 50.002,80.427 U4.52
GPIOD5: J1.5 U4.53 | length 20
  Bottom Layer 4 w0.254: J1.5@39.37,92.583 40.546,91.407 40.546,89.951 41.965,88.532 42.532,88.532 43.155,87.909 44.057,87.909 45.565,86.401 45.565,85.499 50.137,80.927 U4.53
GPIOD6: J1.3 U4.54 | length 21.9
  Bottom Layer 4 w0.254: J1.3@39.37,95.123 40.546,93.947 40.546,92.491 41.965,91.072 43.294,91.072 47.551,86.815 47.551,84.148 50.263,81.436 53.192,81.436 U4.54
GPIOD7: J1.1 U4.55 | length 23
  Bottom Layer 4 w0.254: J1.1@39.37,97.663 40.738,96.295 40.738,94.839 41.965,93.612 43.04,93.612 48.006,88.646 48.006,84.268 50.359,81.915 U4.55@52.451,81.915
GPIOD8: J2.13 U4.42 | length 26.7
  Bottom Layer 4 w0.254: J2.13 39.468,62.455 40.11,62.455 41.101,63.445 42.175,63.445 43.199,64.469 43.199,65.679 43.395,65.874 48.675,65.874 57.98,75.179 57.98,76.094 58.051,76.165 U4.42
GPIOD9: J2.11 U4.43 | length 24.3
  Bottom Layer 4 w0.254: J2.11@39.37,64.77 40.881,66.281 48.507,66.281 57.551,75.325 U4.43
GPIOD10: J2.9 U4.44 | length 23.6
  Bottom Layer 4 w0.203: J2.9 40.429,68.496 40.429,69.916 41.899,71.386 53.002,71.386 57.051,75.435 U4.44
GPIOD11: J2.7 U4.45 | length 22.1
  Bottom Layer 4 w0.203: J2.7 40.429,71.036 40.429,72.456 41.493,73.52 54.561,73.52 56.551,75.51 U4.45
GROUND: D1.1 J6.4 J7.4 Q1.1 | length 30.9
  Top Layer 1 w0.254: J7.4 37.465,114.046 37.465,113.284 ; J6.4@39.37,105.41 37.465,107.315 37.465,113.284 ; Q1.1 50.741,107.791 D1.1 47.833,107.986 45.202,110.617 40.132,110.617 37.465,113.284
ILUM: D7.3 J4.4 Q4.3 R34.1 | length 34.7
  Top Layer 1 w0.254: J4.4@39.37,44.577 38.341,43.548 38.341,41.611 42.746,37.206 57.197,37.206 57.36,37.369 57.36,39.106 D7.3@56.781,39.685 ; D7.3@56.356,39.685 D7.3@56.781,39.685 ; R34.1 60.198,43.884 59.698,44.384 Q4.3 58.4,44.332 58.4,43.852 57.849,43.301 56.954,42.406 56.954,39.858 D7.3@56.781,39.685
IMP: C19.1 D10.3 R36.2 R39.2 U4.11 | length 68
  Top Layer 1 w0.254: R36.2 45.212,42.741 45.482,43.011 D10.3 47.029,43.796 C19.1@47.81,44.577 ; R39.2 C19.1@47.81,44.577 ; v1(60.051,82.824) 60.051,81.681 65.215,76.517 v1(65.849,76.517) ; v1(65.786,65.913) 56.537,65.913 56.388,65.764 56.388,47.244 55.118,45.974 49.212,45.974 48.033,44.795 48.033,44.6 48.01,44.577 C19.1 C19.1@47.81,44.577
  Bottom Layer 4 w0.254: U4.11 v1(60.051,82.824) v1@60.071,82.804 ; v1(65.786,65.913) 65.849,65.977 v1(65.849,76.517)
IMP_IN: J4.3 R39.1 | length 4.1
  Top Layer 1 w0.254: J4.3@41.91,44.577 R39.1
IsFHerror: C21.1 D12.3 R38.2 R41.2 U4.32 | length 43.2
  Top Layer 1 w0.254: C21.1@49.044,95.145 C21.1@49.118,95.219 ; R41.2 49.118,94.856 C21.1@49.118,95.219 ; C21.1 C21.1@49.118,95.219 ; v1(68.767,78.927) 68.864,79.024 68.864,87.406 v1(68.961,87.503) ; v1(68.961,91.948) 68.961,93.831 68.812,93.98 68.589,93.98 65.792,96.777 65.792,97.222 65.163,97.851 D12.3 64.313,97.851 62.316,95.854 R38.2 55.247,95.854 54.643,95.25 49.241,95.25 49.226,95.235 49.134,95.235 C21.1@49.118,95.219
  Bottom Layer 4 w0.254: U4.32 v1(68.767,78.927) ; v1(68.961,87.503) v1(68.961,91.948)
IsFHerror_IN: J6.5 R41.1 | length 22.1
  Top Layer 1 w0.254: J6.5@41.91,107.95 45.593,107.95 48.006,105.537 v4(49.403,105.537) ; v1(46.101,99.06) 46.101,96.578 48.295,94.384 48.395,94.384 R41.1
  Bottom Layer 4 w0.254: v1(46.101,99.06) 49.403,102.362 v4(49.403,105.537)
IsHeating: C20.1 D11.3 R37.2 R40.2 U4.31 | length 63.9
  Top Layer 1 w0.254: R40.2 C20.1 55.626,122.232 55.649,122.209 55.749,122.209 55.845,122.113 D11.3 59.904,122.169 61.305,122.169 61.599,122.463 61.699,122.463 61.722,122.486 R37.2 v1(63.342,122.586) ; v1(68.299,79.427) 68.453,79.581 v1(68.453,88.392)
  Bottom Layer 4 w0.254: v1(63.342,122.586) 74.004,111.924 74.004,95.528 71.06,92.583 69.021,92.583 68.453,92.015 v1(68.453,88.392) ; U4.31 v1(68.299,79.427)
IsHeating_IN: J7.5 R40.1 | length 19.8
  Top Layer 1 w0.254: J7.5 42.042,113.543 v4(45.745,113.543) ; v1(52.832,121.285) 54.456,122.909 54.841,122.909 54.864,122.932 R40.1
  Bottom Layer 4 w0.254: v4(45.745,113.543) 45.745,113.717 46.228,114.2 46.228,118.514 48.237,120.523 52.07,120.523 v1(52.832,121.285)
LightD: Q2.3 R24.1 U4.24 | length 49.4
  Top Layer 1 w0.254: R24.1 45.212,62.542 45.712,62.042 Q2.3 47.51,62.042 47.683,62.215 47.683,62.66 52.917,67.894 70.942,67.894 v1(70.993,67.945)
  Bottom Layer 4 w0.254: U4.24 69.346,82.927 70.993,81.28 v1(70.993,67.945)
LightD_OUT: D3.1 J5.6 Q2.1 | length 17.7
  Top Layer 1 w0.254: J5.6@39.37,54.483 40.64,55.753 40.64,57.658 42.666,59.684 46.147,59.684 48.381,61.918 48.381,62.363 49.01,62.992 Q2.1 D3.1
LightN: Q3.3 R28.1 U4.27 | length 56.3
  Top Layer 1 w0.254: R28.1 45.466,55.557 45.966,55.057 Q3.3 47.86,55.057 48.033,55.23 48.033,56.135 49.403,57.505 49.403,59.414 49.552,59.563 53.953,59.563 54.102,59.712 54.102,67.161 54.251,67.31 v1(70.358,67.31)
  Bottom Layer 4 w0.254: U4.27 70.209,81.427 70.358,81.278 v1(70.358,67.31)
LightN_OUT: D5.1 J5.7 Q3.1 | length 13.5
  Top Layer 1 w0.254: J5.7@41.91,57.023 44.958,53.975 49.636,53.975 49.785,54.124 Q3.1 D5.1
LightR: Q5.3 R35.1 U4.28 | length 61.2
  Top Layer 1 w0.254: R35.1 44.831,48.318 45.331,47.818 Q5.3 47.129,47.818 47.302,47.991 47.302,48.699 49.784,51.181 54.715,51.181 54.864,51.33 54.864,66.294 55.245,66.675 v1(69.469,66.675)
  Bottom Layer 4 w0.254: U4.28 69.346,80.927 69.494,80.778 69.494,66.7 v1(69.469,66.675)
LightR_OUT: D8.1 J5.8 Q5.1 | length 27.5
  Top Layer 1 w0.254: J5.8@39.37,57.023 37.846,55.499 37.846,46.631 37.995,46.482 48.895,46.482 49.054,46.641 Q5.1 D8.1
MCLR: J3.1 R44.1 U4.7 | length 78.8
  Top Layer 1 w0.254: v1(58.039,91.313) 69.85,91.313 v1(69.977,91.186) ; J3.1 77.532,41.306 R44.1
  Bottom Layer 4 w0.254: v1(58.039,91.313) 58.051,91.301 U4.7 ; v1(69.977,91.186) 69.977,86.106 75.819,80.264 75.819,42.926 74.295,41.402 J3.1
NetC2_2: C2.2 R3.2 R8.2 R9.2 | length 3.1
  Top Layer 1 w0.254: C2.2 51.704,96.154 53.198,96.154 R9.2 R8.2 R3.2
NetC7_2: C7.2 U2.3 | length 2.5
  Top Layer 1 w0.254: U2.3 71.653,112.522 72.135,113.004 73.144,113.004 C7.2
NetC9_2: C9.2 R16.2 R19.2 R20.2 | length 4.5
  Top Layer 1 w0.254: C9.2 40.64,126.296 40.663,126.273 41.01,126.273 41.58,125.703 41.918,125.703 41.941,125.68 R20.2 R19.2 R16.2
NetC17_1: C17.1 U4.39 Y1.2 | length 51.7
  Top Layer 1 w0.254: v1(59.563,73.533) 59.69,73.406 74.795,73.406 74.943,73.257 74.943,45.479 Y1.2 73.279,45.085 C17.1
  Bottom Layer 4 w0.254: U4.39 59.551,73.545 v1(59.563,73.533)
NetC18_1: C18.1 U4.40 Y1.1 | length 48.3
  Top Layer 1 w0.254: v1(59.051,72.394) 74.019,72.394 74.168,72.245 74.168,48.204 Y1.1 71.938,45.974 C18.1
  Bottom Layer 4 w0.254: U4.40 v1(59.051,72.394) v1@59.055,72.39
NetC24_2: C24.2 D14.1 R43.1 S1.2 U5.3 | length 31.9
  Top Layer 1 w0.203: D14.1 75.565,84.074 77.216,82.423
  Top Layer 1 w0.254: 77.216,82.423 R43.1 77.955,59.024 77.978,59.047 S1.2 C24.2 U5.3
NetD2_2: D2.2 L1.1 U2.2 | length 22.4
  Top Layer 1 w0.254: U2.2 70.919,111.186 71.948,111.186 81.556,101.578 81.915,101.578 83.185,100.308 D2.2 84.074,99.187 84.074,95.455 L1.1
NetD3_2: D3.2 R21.2 | length 2.1
  Top Layer 1 w0.254: D3.2 59.944,62.865 R21.2
NetD5_2: D5.2 R25.2 | length 2.1
  Top Layer 1 w0.254: D5.2 59.913,56.134 R25.2
NetD8_2: D8.2 R29.2 | length 2.2
  Top Layer 1 w0.254: D8.2 R29.2
NetLED1_2: LED1.2 R5.1 | length 0.9
  Top Layer 1 w0.254: LED1.2 R5.1
NetLED2_2: LED2.2 R15.1 | length 0.8
  Top Layer 1 w0.254: R15.1 LED2.2
NetLED3_2: LED3.2 R17.1 | length 1.2
  Top Layer 1 w0.254: LED3.2 R17.1
NetLED4_1: LED4.1 R12.2 | length 0.9
  Top Layer 1 w0.254: LED4.1 R12.2
NetLED5_2: LED5.2 R30.1 | length 1.6
  Top Layer 1 w0.254: R30.1 LED5.2
NetQ1_3: Q1.3 R10.2 | length 7.8
  Top Layer 1 w0.254: R10.2 52.832,112.852 55.118,110.566 Q1.3
NetQ4_1: Q4.1 R21.1 R25.1 R29.1 | length 23.9
  Top Layer 1 w0.254: Q4.1 57.208,43.434 57.448,43.674 57.448,44.8 59.028,46.38 60.999,46.38 62.58,47.961 R29.1 ; R21.1 R25.1 62.58,52.567 62.611,52.535 R29.1@62.611,48.768
NetR3_1: R3.1 U1.8 | length 2.2
  Top Layer 1 w0.254: R3.1 54.737,98.646 54.897,98.806 U1.8
NetR4_1: R4.1 U2.1 U2.7 U2.8 | length 8.7
  Top Layer 1 w0.254: U2.8 U2.1 70.853,109.106 R4.1
NetR6_1: R6.1 U1.5 | length 1.8
  Top Layer 1 w0.254: R6.1 U1.5
NetR7_2: R7.2 R11.2 U2.5 | length 5.7
  Top Layer 1 w0.254: R7.2 R11.2 64.618,114.427 65.253,113.792 U2.5
NetR16_1: R16.1 U3.8 | length 1.8
  Top Layer 1 w0.254: U3.8 44.825,128.124 R16.1
NetR18_1: R18.1 U3.5 | length 3.5
  Top Layer 1 w0.254: U3.5 45.196,131.962 45.356,132.121 45.356,132.643 46.952,134.239 R18.1
NetR30_2: R30.2 U4.37 | length 53.5
  Top Layer 1 w0.254: v1(60.706,74.549) 60.833,74.422 75.543,74.422 75.692,74.273 75.692,43.18 73.183,40.671 R30.2
  Bottom Layer 4 w0.254: U4.37 60.551,74.704 v1(60.706,74.549)
NetR33_2: R33.2 U4.8 | length 55.1
  Top Layer 1 w0.254: v1(58.547,90.551) 69.088,90.551 71.349,88.29 71.349,85.101 76.2,80.25 76.2,57.404 76.454,57.15 81.084,57.15 81.846,57.912 R33.2
  Bottom Layer 4 w0.254: v1(58.547,90.551) 58.547,88.281 U4.8
PGC: J3.5 U4.17 | length 60.1
  Top Layer 1 w0.254: v1(69.469,86.487) 69.469,85.344 69.977,84.836 v1(69.977,84.709)
  Bottom Layer 4 w0.254: J3.5 64.135,44.196 74.778,54.839 74.778,79.908 v1(69.977,84.709) ; U4.17 69.409,86.427 v1(69.469,86.487)
PGD: J3.4 U4.18 | length 58.8
  Bottom Layer 4 w0.254: U4.18 69.521,85.927 75.184,80.264 75.184,52.832 66.675,44.323 J3.4
RESET: C23.2 D13.1 R42.2 R44.2 U5.1 | length 27.6
  Top Layer 1 w0.254: U5.1 81.406,60.955 82.01,61.559 83.142,61.559 84.734,59.967 84.734,52.156 84.172,51.593 R42.2 83.058,49.627 81.249,47.817 81.249,45.974 79.979,44.704 D13.1 C23.2 79.571,42.037 79.602,42.006 R44.2
RX: J2.10 U4.34 | length 29
  Top Layer 1 w0.254: v1(48.514,67.31) 49.505,68.301 61.382,68.301 61.62,68.539 61.62,70.256 v1(62.103,70.739)
  Bottom Layer 4 w0.254: J2.10@41.91,67.31 v1(48.514,67.31) ; U4.34 62.042,77.068 62.042,70.8 v1(62.103,70.739)
TX: J2.8 U4.33 | length 28.7
  Top Layer 1 w0.254: v1(48.895,68.707) v1(61.214,68.707)
  Bottom Layer 4 w0.254: J2.8@41.91,69.85 43.688,69.85 44.831,68.707 v1(48.895,68.707) ; v1(61.214,68.707) 61.214,69.275 62.542,70.603 62.542,77.068 U4.33
WDI: R33.1 U5.4 | length 1.2
  Top Layer 1 w0.254: U5.4 82.576,57.935 82.599,57.912 R33.1
pads on no net: U4.1 U4.2 U4.3 U4.4 U4.5 U4.6 U4.10 U4.35 U4.36 U4.62 U4.63 U4.64 U5.6

## Polygon pours and split planes (outlines as drawn)
GND on GND (split plane): 86.739,36.07 36.832,36.07 36.832,135.634 86.739,135.634
+5V on +5V (split plane): 86.739,36.07 36.832,36.07 36.832,135.634 86.739,135.634

## Text inside footprints (layer, text, board x,y; h text height)
J1: Top Overlay "2" at 41.275,100.711 h1.27 r270; Top Overlay "1" at 38.735,100.711 h1.27 r270; Top Overlay "14" at 41.275,80.391 h1.27 r270; Top Overlay "13" at 38.735,80.518 h1.27 r270
J2: Top Overlay "13" at 38.735,60.198 h1.27 r270; Top Overlay "14" at 41.275,60.198 h1.27 r270; Top Overlay "1" at 38.735,80.518 h1.27 r270; Top Overlay "2" at 41.275,80.518 h1.27 r270
J4: Top Overlay "3" at 42.291,46.101 h1.27 r90; Top Overlay "4" at 39.751,46.101 h1.27 r90; Top Overlay "2" at 39.751,39.497 h1.27 r90; Top Overlay "1" at 42.291,40.005 h1.27 r90
J5: Top Overlay "8" at 39.751,58.547 h1.27 r90; Top Overlay "7" at 42.291,58.547 h1.27 r90; Top Overlay "1" at 42.291,47.371 h1.27 r90; Top Overlay "2" at 39.751,46.863 h1.27 r90
J6: Top Overlay "1" at 42.291,100.838 h1.27 r90; Top Overlay "2" at 39.751,100.33 h1.27 r90; Top Overlay "5" at 42.291,109.474 h1.27 r90; Top Overlay "6" at 39.751,109.474 h1.27 r90
J7: Top Overlay "1" at 42.291,120.396 h1.27 r90; Top Overlay "2" at 39.751,120.904 h1.27 r90; Top Overlay "5" at 42.291,111.76 h1.27 r90; Top Overlay "6" at 39.751,111.76 h1.27 r90